# Altium PCB Copy of IBC_prijamnik_VB_ver1.PcbDoc
Units mil, origin at the board's own origin, x right, y up, seen from the top; angles counter-clockwise.
Board outline 2364.66 x 1970.95 mil, 4 copper layers (Top Layer, GND 1, GND 2, Bottom Layer), stack 61.418 mil thick; 74 components, 51 nets, 243 pads, 80 vias.
Unrouted connection lines stored in the file: 92.
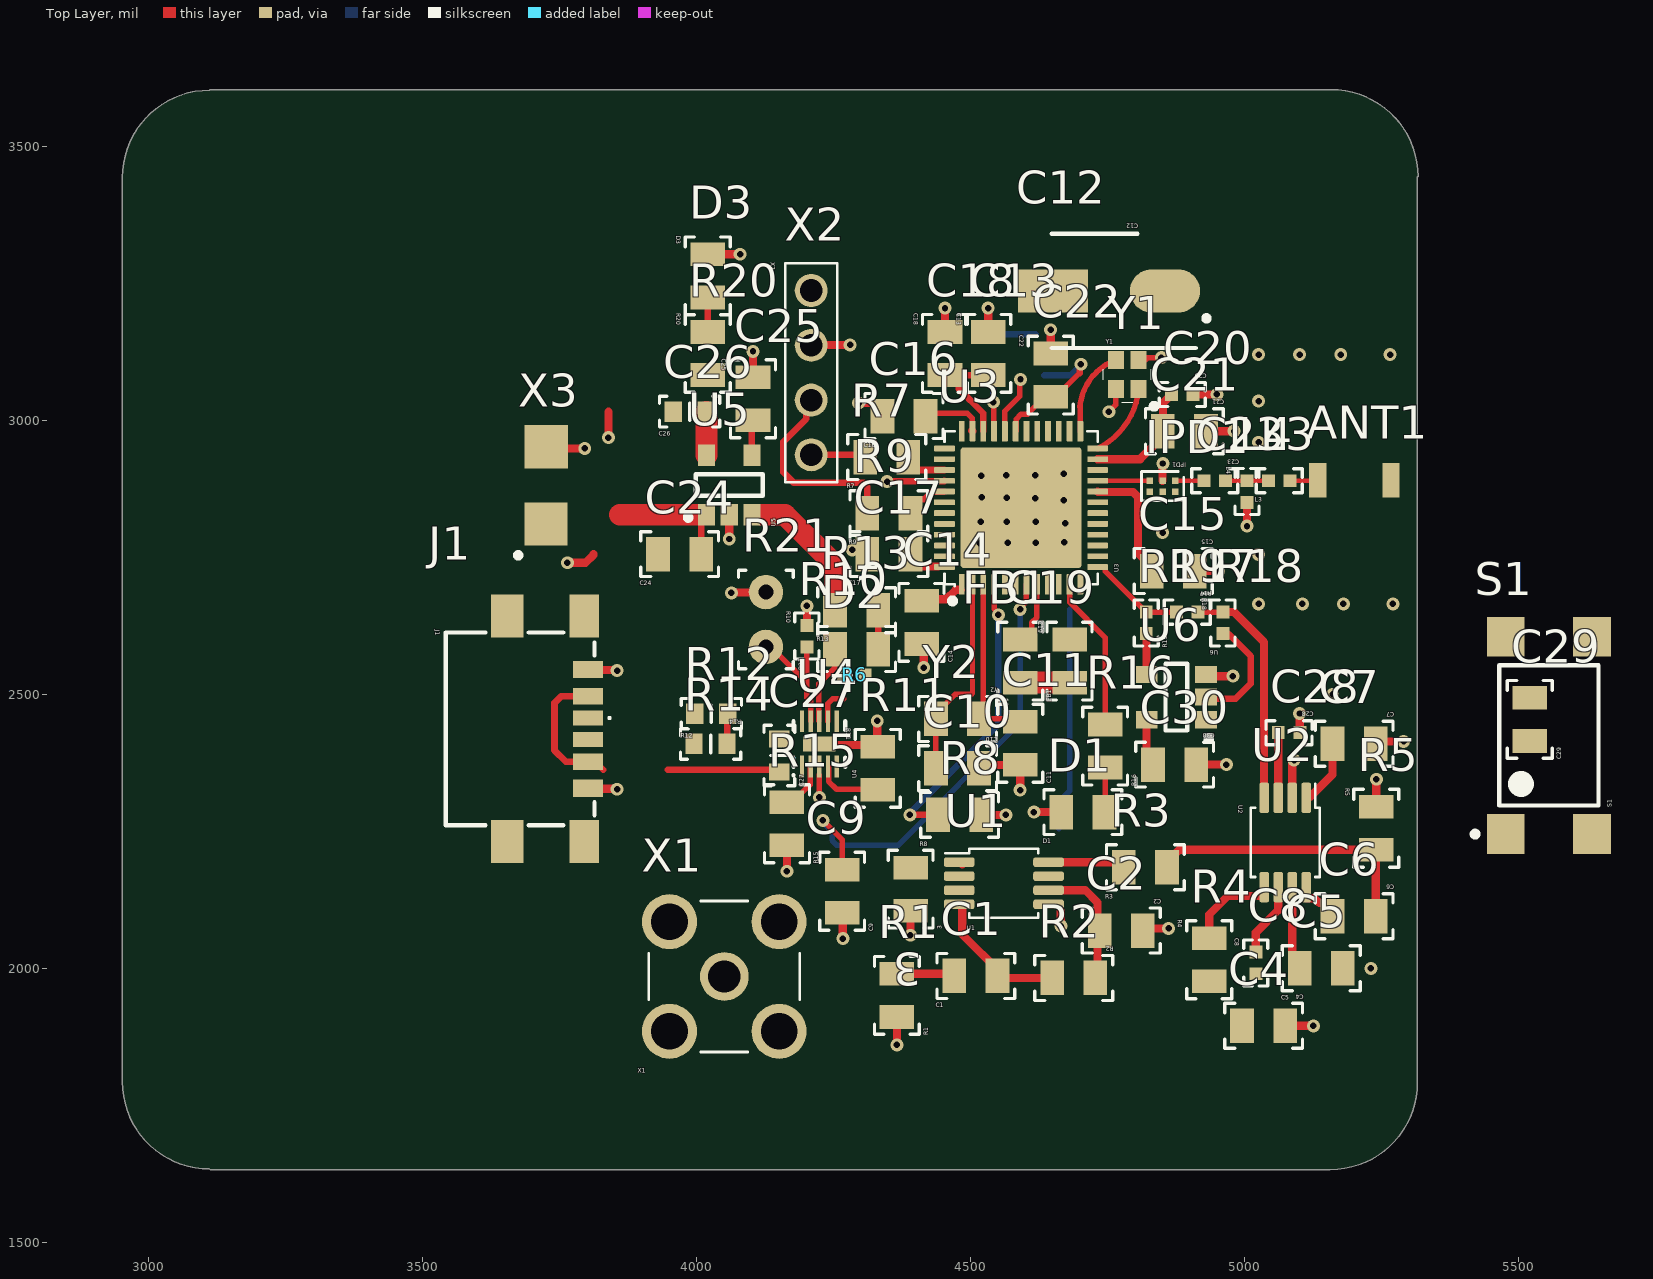
[diagram p0: Top Layer view]
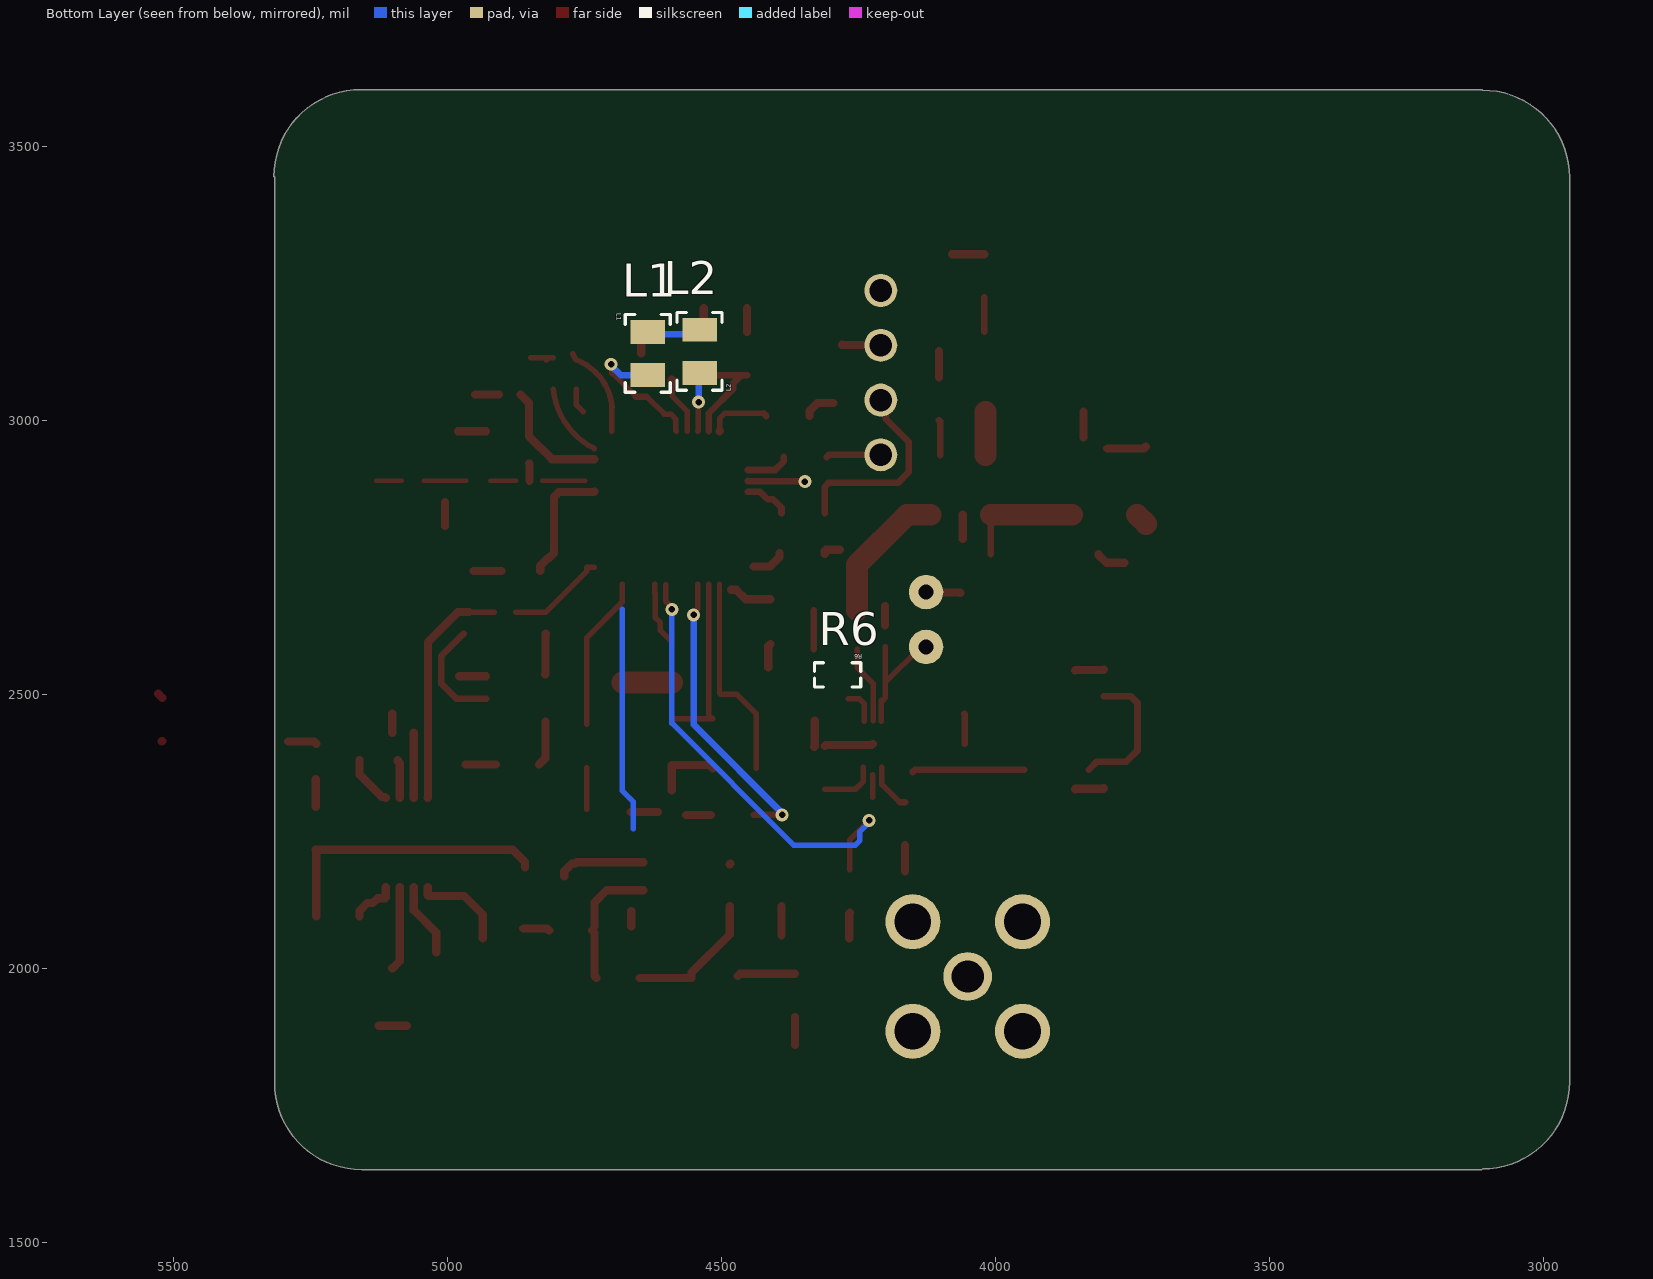
[diagram p1: Bottom Layer view, seen from below]
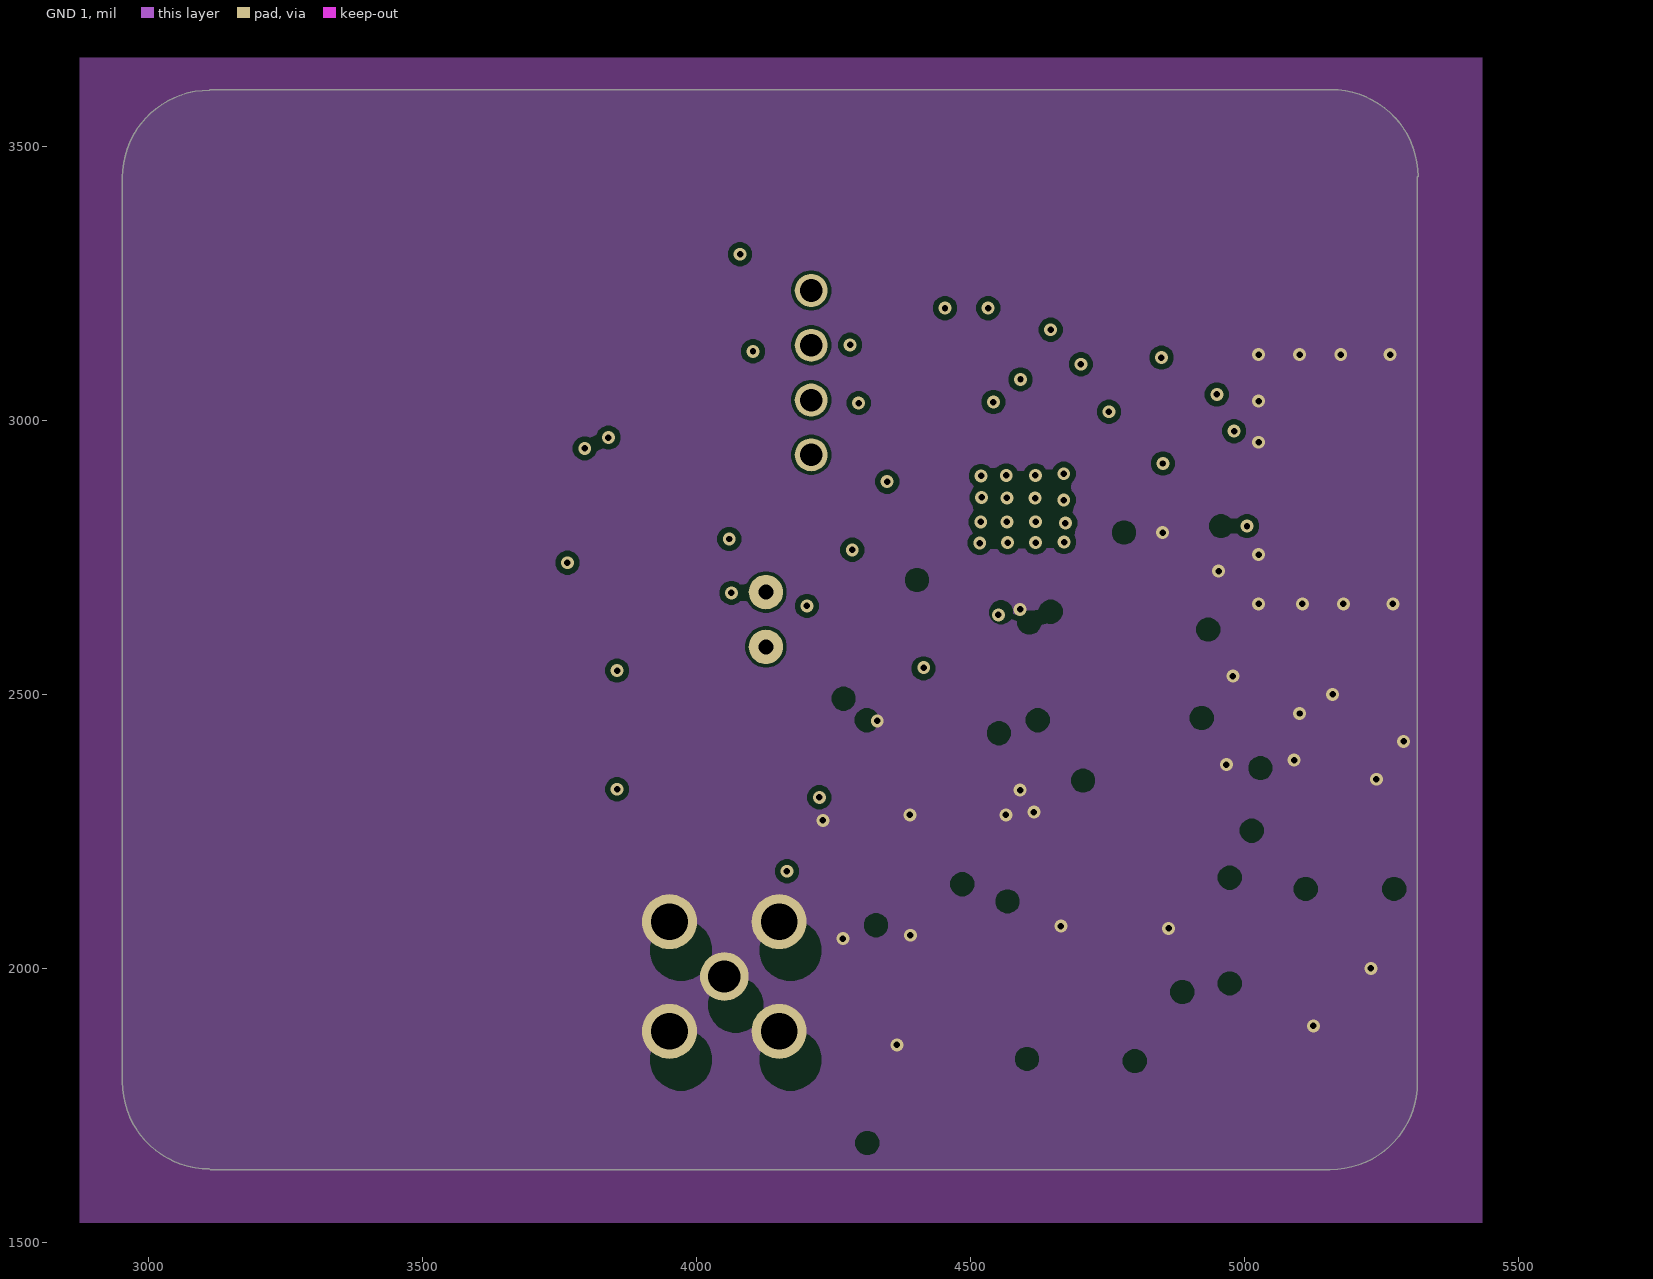
[diagram p2: GND 1]

## Layer stack, top to bottom
Top Solder: solder mask 0.787, SM-001, Dk 3.5
Top Layer: signal copper 1.378
Dielectric 2: prepreg 4.331, FR-4, Dk 4.29
GND 1: signal copper 1.378
Dielectric 1: dielectric 47.244, FR-4, Dk 4.29
GND 2: signal copper 1.378
Dielectric 3: prepreg 4.331, FR-4, Dk 4.29
Bottom Layer: signal copper 1.378
Bottom Solder: solder mask 0.787, SM-001, Dk 3.5

## Board outline
2951.53,1792.56 2951.53,3443.66 cw(c3110.24,3443.66) 3110.24,3602.36 3110.85,3602.97 5156.87,3602.97 5157.48,3603.59 cw(c5157.48,3444.88) 5316.19,3444.88 5314.96,3444.88 5314.96,1791.34 cw(c5156.25,1791.34) 5156.25,1632.63 3111.46,1632.63 3110.24,1633.86 cw(c3110.24,1792.56)

## Design rules (kind name [scope] priority, off if disabled: settings)
Clearance [All] p1: gap=5.98 ignorepadtopadclearanceinfootprint=TRUE except(15.75: Arc-Hole Track-Hole SMDPad-Hole THPad-Hole Via-Hole Fill-Hole Poly-Hole Region-Hole Text-Hole)
PlaneConnect [All] p1: pad.planeconnectstyle=Relief pad.reliefexpansion=20 pad.reliefentries=4 pad.reliefconductorwidth=10 pad.reliefairgap=10 via.planeconnectstyle=Direct via.reliefexpansion=20 via.reliefentries=4 via.reliefconductorwidth=10 via.reliefairgap=10
PolygonConnect [All] p1: connectstyle=Relief reliefconductorwidth=10 reliefentries=4 polygonreliefangle="90 Angle" airgapwidth=10
RoutingVias [All] p1: holewidth=11.81 width=23.62 viastyle="Through Hole" minholewidth=3.94 minwidth=7.87 maxholewidth=39.37 maxwidth=98.43
SolderMaskExpansion [All] p1: expansion=4 istentingtop=FALSE
SupplyNets "Schematic Supply Nets_1" [InNet('GND')] p1: voltage=0.000
SupplyNets "Schematic Supply Nets" [InNet('3V3')] p2: voltage=0.000
Width [All] p1: maxlimit=50 minlimit=10 preferedwidth=10
29 further rules are at their usual default settings.

## Classes and differential pairs
component class "STM32 MCU": C9 C10 C11 C12 C13 C14 C15 C16 C17 C18 C19 C20 C21 C22 C29 C30 D1 FB1 L1 L2 R7 R8 R9 R16 R17 R18 R19 S1 U3 U6 X2 Y1 Y2
component class "Logarithmic Amplifier": C4 C5 C6 C7 C8 C28 R4 R5 U2
component class "IPD and BT Antena": ANT1 C23 IPD1 L3 L4
component class Buffer: 3 C1 C2 R1 R2 R3 U1 X1
component class "Battery Charger and LDO Regulator": C24 C25 C26 C27 D2 D3 J1 J2 R6 R10 R11 R12 R13 R14 R15 R20 R21 U4 U5 X3

## Components (designator, comment, footprint, x,y, rotation, side; value= is the part's Value field where it differs from the comment)
3 "100n" 0805 4390,2144.37 r90 top value=100nF (schematic designator C3)
ANT1 "2450AT18B100E" ANT_2450AT18B100E 5199.8,2890.75 r0 top
C1 "100n" 0805 4509,1986 r0 top value=100nF
C2 "100n" 0805 4774.43,2068.93 r180 top value=100nF
C4 "100n" 0805 5034.37,1895 r180 top value=100nF
C5 "10n" 0805 5139.37,2000 r0 top value=10nF
C6 "100n" 0805 5199.37,2095 r180 top value=100nF
C7 "100n" 0805 5199.37,2410 r180 top value=100nF
C8 "22p" 0402 5020,2009.68 r270 top
C9 "100n" 0805 4265,2140.63 r90 top value=100nF
C10 "15p" 0805 4475.63,2365 r180 top value=15pF
C11 "15p" 0805 4590,2410.63 r90 top value=15pF
C12 "10u/16V" 1210 4751.97,3236.22 r180 top
C13 "100n" 0805 4531.5,3122.05 r270 top value=100nF
C14 "100n" 0805 4410,2631.4 r90 top value=100nF
C15 "100n" 0805 4869.37,2725 r180 top value=100nF
C16 "100n" 0805 4377.95,3007.87 r0 top value=100nF
C17 "100n" 0805 4350.39,2755.91 r0 top value=100nF
C18 "4u7" 0805 4452.76,3122.05 r270 top value=4u7F
C19 "100n" 0805 4680,2560.63 r270 top value=100nF
C20 "100p" 0402 4885.83,3047.24 r180 top
C21 "100n" 0805 4889.76,2980.32 r180 top value=100nF
C22 "4u7" 0805 4645.67,3082.68 r270 top value=4u7F
C23 "1p2" 0402 4944.88,2889.76 r180 top value=1.2pF
C24 "100n" 0805 3968.5,2755.91 r0 top value=100nF
C25 "10n" 0805 4102.36,3039.37 r270 top value=10nF
C26 "1u" 0603 3986.81,3015.75 r0 top value=1µF
C27 "1u" 0603 4150.59,2388.39 r90 top value=1µF
C28 "22p" 0402 5080.63,2430 r180 top
C29 "100n" 0805 5520,2454.37 r90 top value=100nF
C30 "100n" 0805 4871.77,2371.69 r180 top value=100nF
D1 "Green" 0805 4704.37,2285 r0 top
D2 "Green" 0805 4291.34,2582.68 r0 top
D3 "Green" 0805 4019.68,3263.78 r270 top
FB1 "MPZ2012S601AT000" 0805 4590,2560.63 r90 top
IPD1 "MLPF-WB55-01E3" IPD 4849.88,2879.92 r180 top
J1 "USB4135-GF-A" USB4135GFA 3677.17,2437.01 r270 top
L1 "10u" 0805 4633.86,3122.05 r270 bottom value=10uH
L2 "10n" 0805 4539.37,3125.98 r90 bottom value=10nH
L3 "3n3" 0402 5062.99,2889.76 r0 top value=3.3nH
L4 "2n7" 0402 5003.94,2870.08 r270 top value=2.7nH
R1 "49R9" 0805 4365,1950.63 r90 top value=49,9
R2 "2k" 0805 4687.82,1982.32 r180 top
R3 "49R9" 0805 4818.54,2184.28 r0 top value=49,9
R4 "4R7" 0805 4935,2015.63 r270 top value=4.7
R5 "52R3" 0805 5240,2255.63 r270 top value=52.3
R6 "0R0" 0402 4287.4,2535.43 r0 top
R7 "49R9" 0805 4346.46,2933.07 r0 top value=49,9
R8 "10k" 0805 4479.37,2280 r0 top
R9 "49R9" 0805 4350.39,2830.71 r0 top value=49,9
R10 "10k" 0402 4200.79,2606.3 r270 top
R11 "2k" 0805 4330,2365 r270 top
R12 "5k1" 0603 4026.18,2464.57 r0 top value=5.1kΩ
R13 "1k5" 0805 4291.34,2653.54 r0 top
R14 "5k1" 0603 4025,2409.45 r180 top value=5.1kΩ
R15 "2k2" 0805 4164.37,2263.78 r90 top value=2.2kΩ
R16 "1k5" 0805 4745,2405.63 r90 top
R17 "0R0" 0402 4894.69,2650 r180 top
R18 "0R0" 0402 4960,2630.32 r270 top
R19 "0R0" 0402 4820,2630.32 r90 top
R20 "1k5" 0805 4019.68,3122.05 r270 top
R21 "10k" "TH NTC" 4125.98,2686.61 r0 top
S1 "TL3301AF160QG" SOP400P1000X525-4N 5555,2425 r90 top
U1 "BUF602" MSOP 4560.18,2155.29 r270 top
U2 "AD8310ARMZ-REEL7" MSOP 5073.74,2229.65 r180 top
U3 "STM32WB55CGU6" STM32 4591.54,2840.55 r0 top
U4 "BQ24040DSQR" WSON-10 4223.43,2409.45 r90 top
U5 "TPS73633DBVR" "SOT23 5pin" 4059.06,2881.89 r90 top
U6 "74AHC1G17GWH" "SOT23 5pin" 4875,2495 r180 top
X1 "60312002114503" SMA 4050,1985 r0 top
X2 "HDR 1X4" "HEADER 1X4" 4208.66,3087.01 r270 top
X3 "BAT HDR" BATTERY 1466.73,7787.73 r90 top
Y1 "NX2016SA-32MHz" NX2016_4P 4785.43,3083.66 r90 top
Y2 "NX2012SA-32.768kHz" 0805 4475.63,2455 r180 top

## Footprints (in the part's own frame and the unit in brackets; to place one, negate y for a bottom-side part, rotate by r counter-clockwise, add the part's x,y. Pads: shape width x height; smd on the part's side, far side on the other; paste and mask are expansions set on the pad)
0402 [mm]
  rect 0.6x0.6 smd: 1(-0.5,0) 2(0.5,0)
  silkscreen extent -1.07,-0.56 1.07,0.56, body extent -0.5,-0.25 0.5,0.25, height 0.48
0603 [mm]
  rect 0.8x0.95 smd: 1(-0.765,0) 2(0.765,0)
  silkscreen extent -1.4,-0.71 1.4,0.71, body extent -0.8,-0.41 0.8,0.41, height 0.45
0805 [mm]
  rect 1.1x1.6 smd: 1(-1,0) 2(1,0)
  silkscreen extent -1.8,-1.04 1.8,1.04, body extent -1,-0.62 1,0.63, height 0.6
1210 [mm]
  oval 3.25x2 smd: 1(-2.6,0)
  rect 3.25x2 smd: 2(2.6,0)
  silkscreen extent -4.63,-2.65 2.65,2.65
ANT_2450AT18B100E [mm]
  rect 0.8x1.6 smd: 1(-1.7,0) 2(1.7,0)
  body extent -1.6,-0.8 1.6,0.8, height 1.41
BATTERY [mm]
  rect 2x2 smd: NEG(-122.83,-57.358) POS(-126.408,-57.345)
  silkscreen extent -127.98,-56.17 -127.75,-55.94
"HEADER 1X4" [mm]
  round 1.53 hole 1.05 paste-2539.97: 1(-3.81,0) 2(-1.27,0) 3(1.27,0) 4(3.81,0)
  silkscreen extent -5.08,-1.2 5.08,1.2, body extent -5.33,-1.45 5.33,1.45, height 8.39
IPD [mm]
  rect 0.3x0.3 smd paste-0.05: A1(-0.587,-0.25) A2(0,-0.25) A3(0.587,-0.25) B1(-0.587,0.25) B2(0,0.25) B3(0.587,0.25)
  silkscreen extent -0.98,-0.68 0.98,0.68, body extent -1.05,-0.75 1.05,0.75, height 0.41
MSOP [mm]
  rrect50% 0.45x1.42 smd mask+0.06: 1(-0.975,-2.07) 2(-0.325,-2.07) 3(0.325,-2.07) 4(0.975,-2.07) 5(0.975,2.07) 6(0.325,2.07) 7(-0.325,2.07) 8(-0.975,2.07)
  silkscreen extent -1.6,-2.72 1.6,1.6, body extent -1.8,-2.98 1.8,2.98, height 1.1
NX2016_4P [mm]
  rect 0.85x0.75 smd mask+0.05: 1(-0.675,-0.525) 2(0.675,-0.525) 3(0.675,0.525) 4(-0.675,0.525)
  silkscreen extent -1.6,-1.37 1.3,1.12, body extent -1,-0.8 1,0.8, height 0.7
SMA [mm]
  round 2.25 hole 1.5 paste-2539.97: 1(0,0)
  round 2.55 hole 1.7 paste-2539.97: 2(-2.54,2.54) 3(2.54,2.54) 4(-2.54,-2.54) 5(2.54,-2.54)
  silkscreen extent -3.5,-3.5 3.5,3.5, body extent -4.06,-4.06 4.06,4.06, height 9.56
SOP400P1000X525-4N [mm]
  rect 1.85x1.75 smd: 1(-4.575,2) 2(-4.575,-2) 3(4.575,-2) 4(4.575,2)
  silkscreen extent -4.7,-2.3 3.25,3.55, body extent -3.65,-2.3 3.65,2.3, height 5.25
"SOT23 5pin" [mm]
  rect 1x0.8 smd: 1(-1.375,1.05) 2(-1.375,0) 3(-1.375,-1.05) 4(1.375,-1.05) 5(1.375,1.05)
  silkscreen extent -1.62,-1.55 0.5,2.03, body extent -0.88,-1.52 0.87,1.53, height 1.45
STM32 [mm]
  rrect25% 0.27x0.96 smd mask+0.07: 1(-2.75,-3.55) 2(-2.25,-3.55) 3(-1.75,-3.55) 4(-1.25,-3.55) 5(-0.75,-3.55) 6(-0.25,-3.55) 7(0.25,-3.55) 8(0.75,-3.55) 9(1.25,-3.55) 10(1.75,-3.55) 11(2.25,-3.55) 12(2.75,-3.55) 25(2.75,3.55) 26(2.25,3.55) 27(1.75,3.55) 28(1.25,3.55) 29(0.75,3.55) 30(0.25,3.55) 31(-0.25,3.55) 32(-0.75,3.55) 33(-1.25,3.55) 34(-1.75,3.55) 35(-2.25,3.55) 36(-2.75,3.55)
  rrect25% 0.96x0.27 smd mask+0.07: 13(3.55,-2.75) 14(3.55,-2.25) 15(3.55,-1.75) 16(3.55,-1.25) 17(3.55,-0.75) 18(3.55,-0.25) 19(3.55,0.25) 20(3.55,0.75) 21(3.55,1.25) 22(3.55,1.75) 23(3.55,2.25) 24(3.55,2.75) 37(-3.55,2.75) 38(-3.55,2.25) 39(-3.55,1.75) 40(-3.55,1.25) 41(-3.55,0.75) 42(-3.55,0.25) 43(-3.55,-0.25) 44(-3.55,-0.75) 45(-3.55,-1.25) 46(-3.55,-1.75) 47(-3.55,-2.25) 48(-3.55,-2.75)
  rrect5% 5.6x5.6 smd paste+0 mask+0.07: 49(0,0)
  silkscreen extent -3.55,-4.44 3.55,3.55, body extent -3.96,-3.96 3.96,3.96, height 0.6
"TH NTC" [mm] "TH-2, 3,7x2,54 mm"
  round 1.6 hole 0.7: 1(0,0) 4(0,-2.54)
  silkscreen extent -1.27,-3.56 1.27,1.02
USB4135GFA [mm]
  rect 0.7x1.4 smd: A5(-0.5,3.155) B5(0.5,3.155)
  rect 0.76x1.4 smd: A9(1.52,3.155) B9(-1.52,3.155)
  rect 0.8x1.4 smd: A12(2.75,3.155) B12(-2.75,3.155)
  rect 2x1.35 smd: MP1(-5.225,2.98) MP2(5.225,2.98)
  rect 2x1.5 smd: MP3(-5.225,-0.6) MP4(5.225,-0.6)
  silkscreen extent -4.47,-3.45 4.47,4.2
WSON-10 [mm]
  rect 1x0.2 smd: 1(-1.045,0.8) 2(-1.045,0.4) 3(-1.045,0) 4(-1.045,-0.4) 5(-1.045,-0.8) 6(1.045,-0.8) 7(1.045,-0.4) 8(1.045,0) 9(1.045,0.4) 10(1.045,0.8)
  rect 0.69x1.5 smd: 11(0,0)
  silkscreen extent -1.5,-1.2 1.05,1.25, body extent -1.05,-1.05 1.05,1.05, height 0.8

## Part data
3 C1 C2 C4 C6 C7 C9 C13 C14 C15 C16 C17 C19 C21 C24 C29 C30: library part MCJCU21GBB7104KTPA01, "Kondenzator, X7R, 10%, 50VDC", Capacitance=100nF, Case/Package=0805, Manufacturer=TDK, Manufacturer Part Number=C2012X7R1H104K125AE, Supplier Part Number 1=963-MCJCU21GBB7104KT, Category="Ceramic Capacitors", ComponentLink1Description=https://datasheet.ciiva.com/29534/mlcc-commercial-soft-en-29534235.pdf?src-supplier=Digi-Key, Kučište=0805, Supplier 1=Mouser, Supplier 2=Mouser, Supplier Part Number 2=810-C2012X7R1H104KAE
ANT1: "Antena, 2.45GHz", Case/Package=CSMD, Manufacturer=Johanson, Supplier Part Number 1=609-2450AT18B100E, Category="RF Antennas", ComponentLink1Description=https://datasheet.ciiva.com/24025/antenna-2450at18b100-242422-24025839.pdf?src-supplier=Mouser, Manufacturer Part Number=2450AT18B100E, Supplier 1=Mouser
C5 C25: library part C0805C103K5RECAUTO, "Kondenzator, C0G, 10%, 50VDC", Capacitance=10nF, Case/Package=0805, Manufacturer=KEMET, Supplier Part Number 1=80-C0805C103K5RECAUT, Category="Ceramic Capacitors", ComponentLink1Description=http://www.farnell.com/datasheets/2723804.pdf?src-supplier=Farnell, Kučište=0805, Manufacturer Part Number=C0805C103K5RECAUTO, Supplier 1=Mouser
C8 C28: library part KAM05ACG1H220FH, "Kondenzator, C0G, 1%, 50VDC", Supplier Part Number 1=581-KAM05ACG1H220FH, Kučište=0402, Supplier 1=Mouser
C10 C11: library part 08052U150JAT2A, "Kondenzator, C0G, 10%, 160VDC", Capacitance=15pF, Case/Package=0805, Manufacturer=Murata, Manufacturer Part Number=GRM21A5C2D150JW01D, Supplier Part Number 1=81-GRM21A5C2D150JW1D, Category="Ceramic Capacitors", ComponentLink1Description=http://components.arrow.com/part/dataview/0323_07284744?src-supplier=Arrow+Europe, Kučište=0805, Supplier 1=Mouser, Supplier 2=Mouser, Supplier Part Number 2=581-08052U150J
C12: library part 581-THJB106K016SJN, "Elektrolitski kondenzator, Ta, 10%, 16V", Supplier Part Number 1=478-13152-1-ND, Supplier 1=DigiKey
C18 C22: library part CGA4J1X7R1H475K125AC, "Kondenzator, C0G, 10%, 50VDC", Capacitance=4u7F, Case/Package=0805, Manufacturer=TDK, Supplier Part Number 1=810-CGA4J1X7R1H475K1, Category="Ceramic Capacitors", ComponentLink1Description=https://product.tdk.com/info/en/catalog/datasheets/mlcc_automotive_general_en.pdf?src-supplier=Digi-Key, Kučište=0805, Manufacturer Part Number=CGA4J1X7R1H475K125AC, Supplier 1=Mouser
C20: library part GCM1555C2A101GE02D, "Kondenzator, C0G, 2%, 100VDC", Supplier Part Number 1=490-GCM1555C2A101GE02DTR-ND, Kučište=0402, Supplier 1=DigiKey
C23: library part 609-QSCF500Q1R2B1GV0, "Kondenzator, C0G, 10%, 50VDC", Capacitance=1.2pF, Case=0402, Manufacturer=Johanson, Manufacturer Part Number=500R07S1R2BV4T, Supplier Part Number 1=609-500R07S1R2BV4T, Case/Package=0402, Category="Ceramic Capacitors", ComponentLink1Description=https://datasheet.ciiva.com/1461/1731432-1461669.pdf?src-supplier=Element14, Supplier 1=Mouser, Supplier 2="Arrow Electronics", Supplier Part Number 2=500R07S1R2BV4T
C26 C27: library part C1608X7R1H105K080AB, "Kondenzator, X7R, 10%, 50VDC", Dielectric Material=Ceramic, Manufacturer=TDK, Max Operating Temperature=125°C, Min Operating Temperature=-55°C, Supplier Part Number=445-C1608X7R1H105K080ABCT-ND, Voltage Rating (DC)=50V, Category="Ceramic Capacitors", ComponentLink1Description=https://datasheet.octopart.com:443/C1608X7R1H105K080AB-TDK-datasheet-175423548.pdf?src-supplier=IHS, ComponentLink1URL=https://datasheet.octopart.com:443/C1608X7R1H105K080AB-TDK-datasheet-175423548.pdf?src-supplier=IHS, Height=800µm, Kučište=0603, Length=1.6mm, Lifecycle Status=Production, Manufacturer Part Number=C1608X7R1H105K080AB, Mounting Technology="Surface Mount", Number of Terminals=2, Pricing="1=0.21, 10=0.121, 50=0.0866, 100=0.076, 500=0.05824, 1000=0.05277 (USD)", Stock=9450, Supplier=DigiKey, Width=800µm
D1 D2 D3: library part SM0805GCL, "Dioda, svjetleća, 1,9V", Case/Package=0805, Manufacturer=Bivar, Supplier Part Number 1=749-SM0805GCL, Category=LEDs, ComponentLink1Description=https://datasheet.ciiva.com/16487/sm0805gcl-16487554.pdf?src-supplier=Future+Electronics, Kučište=0805, Manufacturer Part Number=SM0805GCL, Supplier 1=Mouser
FB1: "Feritna perla, 600Ohm", Case/Package=0805, Manufacturer=TDK, Supplier Part Number 1=810-MPZ2012S601AT000, Category=Inductors, ComponentLink1Description=https://datasheet.ciiva.com/46634/beads-commercial-power-mpz-en-46634335.pdf?src-supplier=Digi-Key, Kučište=0805, Manufacturer Part Number=MPZ2012S601AT000, Supplier 1=Mouser
IPD1: "RF Filtar, 2.4-2.5GHz", Manufacturer=STMicroelectronics, Supplier Part Number 1=511-MLPF-WB55-01E3, Category="Integrated Passive Device", ComponentLink1Description=http://www.farnell.com/datasheets/2802556.pdf?src-supplier=Farnell, Manufacturer Part Number=MLPF-WB55-01E3, Supplier 1=Mouser
J1: "USB-C priključak", Manufacturer_Name="GCT (GLOBAL CONNECTOR TECHNOLOGY)", Mouser Part Number=640-USB4135-GF-A, Supplier Part Number 1=3946920, Datasheet Link=https://ar.mouser.com/datasheet/2/837/usb4135-2930399.pdf, Geometry.Height=3.5mm, Manufacturer_Part_Number=USB4135-GF-A, Mouser Price/Stock=https://www.mouser.co.uk/ProductDetail/GCT/USB4135-GF-A?qs=Li%252BoUPsLEnt6HRo6RUvaXA%3D%3D, Supplier 1=Farnell
L1: library part LSQBA201212T100KR, "Zavojnica, neoklopljena, 500mADC,", Case/Package=0805, Manufacturer=Murata, Manufacturer Part Number=LQM21FN100M70L, Category="Fixed Inductors", ComponentLink1Description=https://datasheet.ciiva.com/18088/getdatasheetpartid-74214-18088963.pdf?src-supplier=Verical, Kučište=0805, Supplier 1=Avnet, Supplier 2=Mouser, Supplier Part Number 1=LQM21FN100M70L, Supplier Part Number 2=81-LQM21FN100M70L
L2: library part AIMC-0805-10NJ-T, "Zavojnica, neoklopljena, +/-5%, 300mADC", Case Code (Imperial)=0402, Case Code (Metric)=1005, Case/Package=0805, Manufacturer=Abracon, Max Operating Temperature=155°C, Min Operating Temperature=-55°C, Power Dissipation=62.5mW, Supplier Part Number=2692041, Supplier Part Number 1=815-AIMC-0805-10NJT, Temperature Coefficient=400ppm/°C, Voltage Rating=50V, Category="Fixed Inductors", ComponentLink1Description=https://datasheet.octopart.com:443/MCMR04X000-PTL-Multicomp-datasheet-10850617.pdf?src-supplier=IHS, ComponentLink1URL=https://datasheet.octopart.com:443/MCMR04X000-PTL-Multicomp-datasheet-10850617.pdf?src-supplier=IHS, ComponentLink2Description=https://datasheet.octopart.com:443/MCMR04X000-PTL-Multicomp-datasheet-99731353.pdf?src-supplier=Farnell, ComponentLink2URL=https://datasheet.octopart.com:443/MCMR04X000-PTL-Multicomp-datasheet-99731353.pdf?src-supplier=Farnell, ComponentLink3Description=https://datasheet.octopart.com:443/MCMR04X000-PTL-Multicomp-datasheet-15896274.pdf?src-supplier=Newark, ComponentLink3URL=https://datasheet.octopart.com:443/MCMR04X000-PTL-Multicomp-datasheet-15896274.pdf?src-supplier=Newark, Composition=Ceramic, Contact Plating=Tin, Kučište=0805, Lifecycle Status=Production, Manufacturer Part Number=AIMC-0805-10NJ-T, Mounting Technology="Surface Mount", Number of Terminals=2, Packaging="Cut Tape", Power Rating=62.5mW, Pricing="10000=0.0033, 50000=0.0029 (GBP)", REACH SVHC=No, RoHS=Compliant, Stock=490000, Supplier=Farnell, Supplier 1=Mouser, Voltage Rating (DC)=50V
L3: library part BSCH1005053N3SCS, "Zavojnica, neoklopljena, 400mADC", Case/Package=0402, Manufacturer=Johanson, Manufacturer Part Number=L-07C3N3SV6T, Supplier Part Number 1=609-L-07C3N3SV6T, Category="Fixed Inductors", Kučište=0402, Supplier 1=Mouser, Supplier 2=Farnell, Supplier Part Number 2=3773633
L4: library part LRC0402CS2N7GV001T, "RF zavojnica, neoklopljena, 300mADC", Case/Package=0402, Manufacturer=Johanson, Manufacturer Part Number=L-07C2N7SV6T, Supplier Part Number 1=609-L-07C2N7SV6T, Category="Fixed Inductors", ComponentLink1Description=https://datasheet.ciiva.com/1473/1168792-1473898.pdf?src-supplier=Element14, Kučište=0402, Supplier 1=Mouser, Supplier 2=DigiKey, Supplier Part Number 2=712-LRC0402CS2N7GV001TCT-ND
R1 R3 R7 R9: library part AC0805FR-0749R9L, "Otpornik, ±100ppm/C, 125mW", Case/Package=0805, Manufacturer=Yageo, Supplier Part Number 1=603-AC0805FR-0749R9L, Category="Chip SMD Resistors", ComponentLink1Description=http://www.yageo.com/NewPortal/yageodocoutput?fileName=/pdf/R-Chip/PYu-AC_51_RoHS_L_6.pdf&src-supplier=Digi-Key, Kučište=0805, Manufacturer Part Number=AC0805FR-0749R9L, Supplier 1=Mouser
R2 R11: library part RC0805FR-102KL, "Otpornik, 1%, 125mW", Manufacturer=Yageo, Supplier Part Number 1=603-RC0805FR-102KL, Category=Resistors, Kučište=0805, Manufacturer Part Number=RC0805FR-102KL, Supplier 1=Mouser
R4: library part AC0805FR-074R7L, "Otpornik, 1%, 125mW", Case/Package=0805, Manufacturer=Yageo, Supplier Part Number 1=603-AC0805FR-074R7L, Category="Chip SMD Resistors", ComponentLink1Description=https://datasheet.ciiva.com/12577/pyu-ac-51-rohs-l-2-12577194.pdf?src-supplier=Mouser, Kučište=0805, Manufacturer Part Number=AC0805FR-074R7L, Supplier 1=Mouser
R5: library part RC0805FR-0752R3L, "Otpornik, 1%, 125mW", Case=0805, Manufacturer=Yageo, Supplier Part Number 1=603-RC0805FR-0752R3L, Case/Package=0805, Category="Chip SMD Resistors", Manufacturer Part Number=RC0805FR-0752R3L, Supplier 1=Mouser
R6 R17 R18 R19: library part CRCW06030000Z0EA, "Otpornik, 1%, 100mW", Supplier Part Number 1="MCMR04X000 PTL", Kučište=0402, Supplier 1=Farnell
R8: library part RC0805JR-0710KL, "Otpornik, 5%, 125mW", Case/Package=0805, Manufacturer=Yageo, Supplier Part Number 1=603-RC0805JR-0710KL, Category="Chip SMD Resistors", ComponentLink1Description=https://datasheet.ciiva.com/7983/444164-7983765.pdf?src-supplier=Element14, Kučište=0805, Manufacturer Part Number=RC0805JR-0710KL, Supplier 1=Mouser
R10: library part NTCG103JF103FT1, "NTC Termistor, 1%", Supplier Part Number 1=NTCG103JF103FT1S, Kučište=0402, Supplier 1=Farnell
R12 R14: library part MCT06030C5101FPW00, "Otpornik, ±100ppm/C, 100mW", Case Code (Imperial)=0603, Case Code (Metric)=1608, Manufacturer="Yageo Group", Manufacturer Part Number=AC0603FR-075K1L, Max Operating Temperature=155°C, Max Power Dissipation=100mW, Min Operating Temperature=-55°C, Supplier Part Number=1978087, Temperature Coefficient=100ppm/°C, Tolerance=1%, Voltage Rating=75V, Case/Package=0603, Category="Chip SMD Resistors", China RoHS=Non-Compliant, ComponentLink1Description=https://datasheet.octopart.com:443/AC0603FR-075K1L-Yageo-datasheet-182189377.pdf?src-supplier=IHS, ComponentLink1URL=https://datasheet.octopart.com:443/AC0603FR-075K1L-Yageo-datasheet-182189377.pdf?src-supplier=IHS, ComponentLink2Description=https://datasheet.octopart.com:443/AC0603FR-075K1L-Yageo-datasheet-86786639.pdf?src-supplier=Upverter, ComponentLink2URL=https://datasheet.octopart.com:443/AC0603FR-075K1L-Yageo-datasheet-86786639.pdf?src-supplier=Upverter, ComponentLink3Description=https://datasheet.octopart.com:443/AC0603FR-075K1L-Yageo-datasheet-178509465.pdf?src-supplier=Newark, ComponentLink3URL=https://datasheet.octopart.com:443/AC0603FR-075K1L-Yageo-datasheet-178509465.pdf?src-supplier=Newark, ComponentLink4Description=https://datasheet.octopart.com:443/AC0603FR-075K1L-Yageo-datasheet-151884373.pdf?src-supplier=Future+Electronics, ComponentLink4URL=https://datasheet.octopart.com:443/AC0603FR-075K1L-Yageo-datasheet-151884373.pdf?src-supplier=Future+Electronics, ComponentLink5Description=https://datasheet.octopart.com:443/AC0603FR-075K1L-Yageo-datasheet-166720450.pdf?src-supplier=Future+Electronics, ComponentLink5URL=https://datasheet.octopart.com:443/AC0603FR-075K1L-Yageo-datasheet-166720450.pdf?src-supplier=Future+Electronics, ComponentLink6Description=https://datasheet.octopart.com:443/AC0603FR-075K1L-Yageo-datasheet-137699919.pdf?src-supplier=Future+Electronics, ComponentLink6URL=https://datasheet.octopart.com:443/AC0603FR-075K1L-Yageo-datasheet-137699919.pdf?src-supplier=Future+Electronics, ComponentLink7Description=https://datasheet.octopart.com:443/AC0603FR-075K1L-Yageo-datasheet-128679721.pdf?src-supplier=X-ON, ComponentLink7URL=https://datasheet.octopart.com:443/AC0603FR-075K1L-Yageo-datasheet-128679721.pdf?src-supplier=X-ON, ComponentLink8Description=https://datasheet.octopart.com/AC0603FR-075K1L-Yageo-datasheet-12512238.pdf, ComponentLink8URL=https://datasheet.octopart.com/AC0603FR-075K1L-Yageo-datasheet-12512238.pdf, ComponentLink9Description=https://datasheet.octopart.com:443/AC0603FR-075K1L-Yageo-Group-datasheet-190301926.pdf?src-supplier=element14+APAC, ComponentLink9URL=https://datasheet.octopart.com:443/AC0603FR-075K1L-Yageo-Group-datasheet-190301926.pdf?src-supplier=element14+APAC, ComponentLink10Description=http://sigma.octopart.com:80/conflict_mineral_statement/Yageo-company-3.pdf?src-supplier=Compliance+Statements, ComponentLink10URL=http://sigma.octopart.com:80/conflict_mineral_statement/Yageo-company-3.pdf?src-supplier=Compliance+Statements, ComponentLink11Description=http://sigma.octopart.com:80/rohs_statement/Yageo-company-2.pdf?src-supplier=Compliance+Statements, ComponentLink11URL=http://sigma.octopart.com:80/rohs_statement/Yageo-company-2.pdf?src-supplier=Compliance+Statements, Composition="Thick Film", Features="Automotive AEC-Q200, Moisture Resistant", Height=450µm, Kučište=0603, Length=1.6mm, Lifecycle Status=Production, Mounting Technology="Surface Mount", Number of Terminals=2, Number of Terminations=2, Packaging="Tape & Reel", Power Dissipation=100mW, Power Rating=100mW, Pricing="500=0.005, 2500=0.005, 5000=0.004, 7500=0.004, 10000=0.004 (GBP)", REACH SVHC=Yes, RoHS=Compliant, Schedule B="8533210045, 8533210045|8533210045|8533210045|8533210045|8533210045|8533210045|8533210045|8533210045|8533210045|8533210045|8533210045|8533210045|8533210045|8533210045|8533210045|8533210045|8533210045|8533210045|8533210045|8533210045|8533210045|8533210045|8533210045|85", Stock=3500, Supplier=RS, Supplier 1=RS, Supplier Part Number 1=1978087, Termination=SMD/SMT, Weight=2.012816mg, Width=800µm, Working Voltage=75V
R13 R16 R20: library part MCU08050C1501FP5, "Otpornik, ±50ppm/C, 100mW", Supplier Part Number 1=MCU08050C1501FP500, ComponentLink5Description=https://datasheet.octopart.com:443/CRCW12061K50JNEA-Vishay-datasheet-21226360.pdf?src-supplier=Newark, ComponentLink5URL=https://datasheet.octopart.com:443/CRCW12061K50JNEA-Vishay-datasheet-21226360.pdf?src-supplier=Newark, ComponentLink8Description=https://datasheet.octopart.com:443/CRCW12061K50JNEA-Vishay-datasheet-24897302.pdf?src-supplier=Farnell, ComponentLink8URL=https://datasheet.octopart.com:443/CRCW12061K50JNEA-Vishay-datasheet-24897302.pdf?src-supplier=Farnell, ComponentLink9Description=https://datasheet.octopart.com:443/CRCW12061K50JNEA-Vishay-datasheet-62316122.pdf?src-supplier=Future+Electronics, ComponentLink9URL=https://datasheet.octopart.com:443/CRCW12061K50JNEA-Vishay-datasheet-62316122.pdf?src-supplier=Future+Electronics, ComponentLink10Description=https://datasheet.octopart.com:443/CRCW12061K50JNEA-Vishay-datasheet-5300368.pdf?src-supplier=Future+Electronics, ComponentLink10URL=https://datasheet.octopart.com:443/CRCW12061K50JNEA-Vishay-datasheet-5300368.pdf?src-supplier=Future+Electronics, ComponentLink11Description=https://datasheet.octopart.com:443/CRCW12061K50JNEA-Vishay-datasheet-137115460.pdf?src-supplier=X-ON, ComponentLink11URL=https://datasheet.octopart.com:443/CRCW12061K50JNEA-Vishay-datasheet-137115460.pdf?src-supplier=X-ON, ComponentLink12Description=https://datasheet.octopart.com:443/CRCW12061K50JNEA-Vishay-Dale-datasheet-47688880.pdf?src-supplier=RS+(Formerly+Allied+Electronics), ComponentLink12URL=https://datasheet.octopart.com:443/CRCW12061K50JNEA-Vishay-Dale-datasheet-47688880.pdf?src-supplier=RS+(Formerly+Allied+Electronics), ComponentLink13Description=https://datasheet.octopart.com:443/CRCW12061K50JNEA-Vishay-datasheet-12001583.pdf?src-supplier=RS+(Formerly+Allied+Electronics), ComponentLink13URL=https://datasheet.octopart.com:443/CRCW12061K50JNEA-Vishay-datasheet-12001583.pdf?src-supplier=RS+(Formerly+Allied+Electronics), ComponentLink14Description=https://datasheet.octopart.com:443/CRCW12061K50JNEA-Vishay-datasheet-5306405.pdf?src-supplier=RS+(Formerly+Allied+Electronics), ComponentLink14URL=https://datasheet.octopart.com:443/CRCW12061K50JNEA-Vishay-datasheet-5306405.pdf?src-supplier=RS+(Formerly+Allied+Electronics), ComponentLink15Description=https://datasheet.octopart.com:443/CRCW12061K50JNEA-Vishay-datasheet-11540273.pdf?src-supplier=Arrow+Electronics, ComponentLink15URL=https://datasheet.octopart.com:443/CRCW12061K50JNEA-Vishay-datasheet-11540273.pdf?src-supplier=Arrow+Electronics, ComponentLink16Description=https://datasheet.octopart.com:443/CRCW12061K50JNEA-Vishay-datasheet-8445837.pdf?src-supplier=element14, ComponentLink16URL=https://datasheet.octopart.com:443/CRCW12061K50JNEA-Vishay-datasheet-8445837.pdf?src-supplier=element14, ComponentLink17Description=https://datasheet.octopart.com:443/CRCW12061K50JNEA-Vishay-datasheet-5377184.pdf?src-supplier=Garrett, ComponentLink17URL=https://datasheet.octopart.com:443/CRCW12061K50JNEA-Vishay-datasheet-5377184.pdf?src-supplier=Garrett, ComponentLink18Description=https://datasheet.octopart.com:443/CRCW12061K50JNEA-Vishay-datasheet-148188.pdf?src-supplier=Garrett, ComponentLink18URL=https://datasheet.octopart.com:443/CRCW12061K50JNEA-Vishay-datasheet-148188.pdf?src-supplier=Garrett, ComponentLink19Description=https://datasheet.octopart.com:443/CRCW12061K50JNEA-Vishay-datasheet-41916.pdf?src-supplier=Garrett, ComponentLink19URL=https://datasheet.octopart.com:443/CRCW12061K50JNEA-Vishay-datasheet-41916.pdf?src-supplier=Garrett, ComponentLink20Description=http://sigma.octopart.com:80/rohs_statement/Vishay-company-15.pdf?src-supplier=Compliance+Statements, ComponentLink20URL=http://sigma.octopart.com:80/rohs_statement/Vishay-company-15.pdf?src-supplier=Compliance+Statements, Kučište=0805, Supplier 1=Farnell
R15: library part MCU08050C2201FP5, "Otpornik, ±100ppm/C, 125mW", Case Code (Imperial)=0805, Case Code (Metric)=2012, Manufacturer=Panasonic, Manufacturer Lifecycle Status=ACTIVE, Manufacturer Part Number=ERJ-PB6B2201V, Max Operating Temperature=155°C, Max Power Dissipation=250mW, Min Operating Temperature=-55°C, Supplier Part Number=4541375, Temperature Coefficient=50ppm/°C, Tolerance=0.1%, Voltage Rating (DC)=150V, Case/Package=0805, Category="Chip SMD Resistors", ComponentLink1Description=https://datasheet.octopart.com:443/ERJ-PB6B2201V-Panasonic-datasheet-82522998.pdf?src-supplier=Panasonic, ComponentLink1URL=https://datasheet.octopart.com:443/ERJ-PB6B2201V-Panasonic-datasheet-82522998.pdf?src-supplier=Panasonic, ComponentLink2Description=https://datasheet.octopart.com:443/ERJPB6B2201V-Panasonic-datasheet-176289525.pdf?src-supplier=TME, ComponentLink2URL=https://datasheet.octopart.com:443/ERJPB6B2201V-Panasonic-datasheet-176289525.pdf?src-supplier=TME, ComponentLink3Description=https://sigma.octopart.com:443/150570796/technical_drawing/Panasonic-ERJPB6B2201V.pdf?src-supplier=Panasonic+SCT, ComponentLink3URL=https://sigma.octopart.com:443/150570796/technical_drawing/Panasonic-ERJPB6B2201V.pdf?src-supplier=Panasonic+SCT, ComponentLink4Description=https://datasheet.octopart.com:443/ERJPB6B2201V-Panasonic-datasheet-177212511.pdf?src-supplier=Burklin+Elektronik, ComponentLink4URL=https://datasheet.octopart.com:443/ERJPB6B2201V-Panasonic-datasheet-177212511.pdf?src-supplier=Burklin+Elektronik, Composition="Thick Film", Country of Origin=Japan, Export Control Classification Number (ECCN) Code=EAR99, Features="Automotive AEC-Q200", Harmonized Tariff Schedule (HTS) Code=8533.21.00.30, Height=600µm, Height - Seated (Max)=711.2µm, Introduction Date=2016-02-25, Kučište=0805, Length=2mm, Lifecycle Status=Production, Mounting Technology="Surface Mount", Number of Terminals=2, Number of Terminations=2, Part Series="High Precision Thick Film Chip Resistors", Power Dissipation=250mW, Power Rating=250mW, Pricing="10=0.0861, 100=0.0757, 500=0.0585, 1000=0.0534, 2500=0.0478, 5000=0.0422 (GBP)", REACH SVHC=Yes, RoHS=Compliant, Schedule B="8533210045, 8533210045|8533210045|8533210045|8533210045|8533210045", Stock=4030, Supplier=Farnell, Supplier 1=Farnell, Supplier 2=Farnell, Supplier Part Number 1=4541375, Supplier Part Number 2=MCU08050C2201FP500, Width=1.25mm, Working Voltage=150V
R21: library part 954-103AT-2, "NTC Termistor, 1%", Supplier Part Number 1=4316-103AT-2-ND, Supplier 1=DigiKey
S1: "Taktilni prekidač", Manufacturer=E-Switch, Supplier Part Number 1=612-TL3301AF1, Category="Tactile Switches", ComponentLink1Description=https://datasheet.ciiva.com/2900/p010516d-2900775.pdf?src-supplier=Digi-Key, Manufacturer Part Number=TL3301AF160QG, Supplier 1=Mouser
U1: "Integrirani Buffer", Manufacturer="Texas Instruments", Manufacturer Part Number=BUF602ID, Supplier Part Number 1=595-BUF602ID, Category="Operational Amplifiers", Supplier 1=Mouser
U2: "Logaritamsko pojačalo", Case/Package=MSOP, Manufacturer="Analog Devices", Supplier Part Number 1=584-AD8310ARMZ-R7, Category="Amplifiers - Op Amps, Buffer, Instrumentation", ComponentLink1Description=https://datasheet.ciiva.com/15128/getdatasheetpartid-243611-15128567.pdf?src-supplier=Verical, Manufacturer Part Number=AD8310ARMZ-REEL7, Supplier 1=Mouser
U3: "STM32 Mikrokontroler, 1,7-3,6V", Case/Package=UFQFPN-48, Manufacturer=STMicroelectronics, Supplier Part Number 1=511-STM32WB55CGU6, Category=Microcontroller, ComponentLink1Description=http://www.farnell.com/datasheets/2792352.pdf?src-supplier=Farnell, Manufacturer Part Number=STM32WB55CGU6, Supplier 1=Mouser
U4: "Li-Ion baterija, 800mA", Case/Package=WSON-10, Manufacturer_Name="Texas Instruments", Mouser Part Number=595-BQ24040DSQR, Arrow Part Number=BQ24040DSQR, Arrow Price/Stock=https://www.arrow.com/en/products/bq24040dsqr/texas-instruments?utm_currency=USD&region=nac, Datasheet Link=http://www.ti.com/lit/gpn/bq24040, Height=0.8mm, Manufacturer_Part_Number=BQ24040DSQR, Mouser Price/Stock=https://www.mouser.co.uk/ProductDetail/Texas-Instruments/BQ24040DSQR?qs=c7TMWs5treTJYvOlVMq%252B%2Fw%3D%3D, Supplier 1="Arrow Electronics", Supplier Part Number 1=BQ24040DSQR
U5: "IC Regulator, 3,3V, 400mADC", Case/Package=SOT-23, Manufacturer="Texas Instruments", Supplier Part Number 1=595-TPS73633DBVR, Category="Voltage Regulators - Linear", ComponentLink1Description=https://datasheet.ciiva.com/41462/001015026-da-01-en-ic-reg-ldo-3-3v-0-tps73633dbvr-sot-5-tid-41462871.pdf?src-supplier=Conrad, Manufacturer Part Number=TPS73633DBVR, Supplier 1=Mouser
U6: "Integrirani Schmittov okidni sklop", Kučište=0805, Supplier 1=Farnell, Supplier Part Number 1=74AHC1G17GWH
X1: "SMA priključak", Manufacturer="Wurth Electronics", Supplier Part Number 1=710-60312002114503, Category="SMA Connector", Manufacturer Part Number=60312002114503, Supplier 1=Mouser
X2: library part 68001-204HLF, "Header 1x4", Manufacturer="Amphenol FCI", Supplier Part Number 1=649-68001-204HLF, Category="Headers and Wire Housings", ComponentLink1Description=https://datasheet.ciiva.com/5164/68000-274255-5164127.pdf?src-supplier=Mouser, Manufacturer Part Number=68001-204HLF, Supplier 1=Mouser
X3: library part "Header 2", "Header, 2-Pin", LatestRevisionDate=17-Jul-2002, LatestRevisionNote="Re-released for DXP Platform.", Publisher="Altium Limited"
Y1: library part NX2012SA32768K1, "Kristalni oscilator 32KHz", Manufacturer=NDK, Manufacturer Part Number=NX2016SA-32MHZ-EXS00A-CS10925, Supplier Part Number 1=644-1375-1-ND, Category=Crystal, Kučište=0805, Supplier 1=DigiKey, Supplier 2=Mouser, Supplier Part Number 2=344-NX2016SA32S06465
Y2: library part NX2012SA-32.768K-STD-MUB-1, "Kristalni oscilator, 32.768KHz", Case/Package=SMD/SMT, Manufacturer=NDK, Manufacturer Part Number=NX2012SA-32.768KHZ-EXS00A-MU00626, Supplier Part Number 1=344-NX2012SA32768K1, Category=Crystal, Kučište=0805, Supplier 1=Mouser

## Via types
v1: diameter 23.62, hole 11.81, Top Layer to GND 1, 73 vias
v2: diameter 23.62, hole 11.81, Top Layer to Bottom Layer, 7 vias

## Nets (pads, with @x,y where several pads share a name; then routed paths per layer and width w, separated by ;. In a path a pad name is that pad's centre, name@x,y a point inside that pad or via, vN(x,y) a via of type N, cw(c..) or ccw(c..) an arc to the next point about the centre after c; other vN are vias at no path point)
3V3: 3.2 C4.2 C12.1 C14.2 C15.2 C16.2 C17.2 C19.2 C20.2 C21.2 C26.2 C30.2 FB1.1 R4.2 R20.2 U1.1 U3.1 U3.20 U3.23 U3.35 U3.40 U3.48 U5.5 U6.5 | length 1059.5
  Top Layer w10: C16.2@4422.15,3012.7 4493.39,3012.7 4502.07,3004.02 U3.35@4502.07,2981.2
  Top Layer w12: C26.2 C26.2@4017.32,3015.35 ; U5.5@4017.32,2936.42 U5.5 ; v2(4347.26,2888.05) 4348.3,2889.08 4451.09,2889.08 U3.40 ; C16.2 C16.2@4422.15,3012.7
  Top Layer w15: C17.2@4393.7,2757.87 4393.7,2750.28 4410.81,2733.17 U3.48@4440.37,2733.17 ; C14.2@4410,2673.66 4455.21,2673.66 4472.42,2690.87 U3.1@4481.63,2690.87 ; U1.1@4482.92,2191.35 U1.1@4484.28,2189.99 ; U3.35@4502.07,2981.2 U3.35 ; U3.20 4732.18,2869.19 4796.21,2869.19 4805,2860.41 4805,2757.78 4813.79,2749 4815.85,2749 4830,2734.84 C15.2 ; U3.23 4809.06,2929.13 4850.39,2970.47 C21.2 4850.39,3031.5 C20.2 ; U6.5@4820.59,2450.43 4820.59,2383.5 C30.2
  Top Layer w40: U5.5@4017.32,2936.42 C26.2@4017.32,3015.35 ; FB1.1 C19.2
  other v1: 4850,2795
BOOT0: R8.1 U3.4 | length 540.4
  Top Layer w10: U3.4 4542.32,2655.82 v2@4550,2648.14
  Top Layer w12: v2(4388.74,2280) R8.1
  Bottom Layer w12: v2@4385,2280 4550,2445 v2(4550,2645)
GND: 3.1 C2.1 C4.1 C5.2 C7.1 C8.2 C9.1 C10.1 C11.1 C12.2 C13.1 C14.1 C15.1 C16.1 C17.1 C18.1 C19.1 C20.1 C21.1 C22.1 C24.1 C25.1 C26.1 C27.2 C28.1 C29.1 C30.1 D1.1 D3.1 IPD1.A2 IPD1.B1 IPD1.B2 IPD1.B3 J1.A12 J1.B12 L4.2 R1.1 R5.1 R6.1 R8.2 R10.1 R11.1 R15.1 R21.1 S1.1 S1.2 U1.5 U2.2 U3.22 U3.32 U4.3 U4.11 U5.2 U6.3 X1.2 X1.3 X1.4 X1.5 X2.2 X3.NEG Y1.2 Y1.4 | length 2234.2
  Top Layer w10: v1(4223.43,2312.02) U4.3@4223.43,2353.62 ; U3.32 4562.01,3016.84 4588.9,3043.74 v1@4588.9,3073.15
  Top Layer w15: X3.NEG 3728.02,2948.82 v1(3795.28,2948.82) ; v1(3763.78,2740.16) 3796.87,2740.16 3811.02,2754.31 3811.02,2755.91 ; J1.A12 3802.36,2327.76 3853.35,2327.76 v1(3854.33,2326.77) ; J1.B12 3802.36,2544.29 3853.35,2544.29 v1(3854.33,2543.31) ; v1(3838.58,2968.5) 3838.58,3015.75 ; D3.1 v1(4078.74,3303.15) ; v1(4059.06,2783.46) U5.2 ; v1(4062.99,2685.04) 4063.78,2685.83 4125.2,2685.83 R21.1 ; C25.1 v1(4102.36,3125.98) ; v1(4164.37,2177.17) R15.1 ; R10.1 v1(4200.79,2661.42) ; X2.2 4209.06,3137.4 4279.13,3137.4 v1(4279.53,3137.8) ; U4.11 4225.39,2407.48 4308.92,2407.48 R11.1@4310.88,2405.51 ; C9.1 4266.33,2099.93 v1(4266.33,2054.28) ; v1(4283.46,2763.78) 4308.68,2763.78 4311.02,2761.44 C17.1 ; v1(4295.28,3031.5) 4324.43,3031.5 4338.58,3017.34 C16.1 ; v1(4329.16,2451.61) 4329.16,2405.21 R11.1 ; v1(4365,1860.08) R1.1 ; v1(4389.64,2060.27) 4389.64,2112.98 3.1@4390,2113.33 ; C14.1 4413.94,2588.1 v1(4413.94,2548.73) ; C18.1 v1(4452.76,3204.72) ; C10.1 4521.26,2371.26 C11.1 v1(4590,2325) ; R8.2 v1(4563.74,2280) ; C13.1 v1(4531.5,3204.72) ; v1@4588.9,3073.15 v1(4590.55,3074.8) ; v1(4615,2285) D1.1 ; C22.1 v1(4645.67,3165.35) ; v1(4664.2,2076.81) 4664.2,2104.37 ; C2.1 4817.74,2072.87 v1(4861.05,2072.87) ; IPD1.A2 4849.88,2920.75 v1(4850.39,2921.26) ; C15.1@4900.87,2725 v1(4952.05,2725) ; C20.1 v1(4948.82,3047.24) ; C30.1 v1(4966.26,2371.69) ; U6.3@4928.86,2533.11 v1(4978.07,2533.11) ; C21.1 v1(4980.31,2980.32) ; v1(5003.94,2807.09) L4.2 ; C4.1 v1(5124.92,1895) ; U2.2 5086.54,2374.1 5090.1,2377.67 v1(5090.1,2380) ; v1(5100,2465) 5100.16,2464.84 5100.16,2430.16 C28.1 ; C7.1 5242.68,2413.94 v1(5289.92,2413.94) ; R5.1 v1(5240,2345) ; C29.1 C29.1@5520.8,2414.2
  other v1: 5230,2000 5160,2500 4751.97,3015.75
NetANT1_1: ANT1.1 L3.2 | length 47.2
  Top Layer w7.87: L3.2 ANT1.1@5129.92,2889.76
NetC1_1: C1.1 R1.2 X1.1 | length 106.3
  Top Layer w15: R1.2 4465.63,1990 C1.1
NetC1_2: C1.2 R2.2 U1.4 | length 254.3
  Top Layer w15: U1.4@4484.28,2113.22 4484.28,2061.85 4553.96,1992.16 4553.96,1982.32 R2.2
NetC2_2: C2.2 R2.1 U1.6 | length 231.9
  Top Layer w15: U1.6 4708.75,2142.49 4731.13,2120.11 C2.2@4731.13,2076.81 ; R2.1 4731.13,1986.25 4731.13,2065 C2.2
NetC5_1: C5.1 R4.1 U2.5 U2.7 | length 326.6
  Top Layer w15: R4.1 4935,2098.31 4968.82,2132.13 5034,2132.13 5035.35,2133.48 U2.5 ; U2.7 5086.54,2013.46 C5.1
NetC6_1: C6.1 R3.2 R5.2 | length 522.9
  Top Layer w15: R3.2 4857.91,2194.12 4880.05,2216.26 R5.2 5238.74,2215 C6.1
NetC6_2: C6.2 U2.8 | length 86.8
  Top Layer w15: U2.8 5112.13,2129.05 5113.48,2127.7 5127.3,2127.7 5136,2119 5145.85,2119 5160,2104.84 C6.2
NetC7_2: C7.2 U2.1 | length 92
  Top Layer w15: U2.1 5113.48,2312.5 5119.19,2312.5 5160,2353.31 C7.2@5160,2380
NetC8_1: C8.1 U2.6 | length 135.7
  Top Layer w15: C8.1 5020,2065.08 5060.94,2106.02 U2.6
NetC10_2: C10.2 U3.2 Y2.2 | length 380.7
  Top Layer w10: C10.2 Y2.2 4436.26,2464.84 4471.42,2500 4500.91,2500 4502.95,2502.05 U3.2
NetC11_2: C11.2 U3.3 Y2.1 | length 250.2
  Top Layer w10: 4522.64,2625 4522.64,2462.64 Y2.1 4585,2455 C11.2
NetC13_2: C13.2 C18.2 U3.34 | length 215.8
  Top Layer w12: U3.34 4522.64,3012.8 4478.25,3057.18 4478.25,3067.02 4462.6,3082.68 C18.2 C13.2
NetC22_2: C22.2 L1.2 U3.31 | length 266.2
  Top Layer w10: U3.31 4582.38,2981 4582.38,3001.7 4591.88,3011.2 4603.72,3011.2 C22.2@4635.83,3043.31 ; C22.2@4655.51,3043.31 4698.56,3086.36
  Top Layer w12: C22.2@4635.83,3043.31 C22.2 C22.2@4655.51,3043.31 ; 4698.56,3086.36 4698.56,3100.14 v2(4700.79,3102.36)
  Bottom Layer w12: L1.2 4683.35,3082.68 4700.79,3100.11 v2(4700.79,3102.36)
NetC23_1: C23.1 IPD1.A1
NetC23_2: C23.2 L3.1 L4.1 | length 126
  Top Layer w7.87: 4874.02,2889.76 C23.2@4921.26,2889.76 ; 4964.57,2889.76 L4.1 L3.1
NetC25_2: C25.2 U5.4 | length 64.8
  Top Layer w12: U5.4 4100.39,2998.03 C25.2
NetC27_1: C27.1 J1.A9 J1.B9 U4.1 | length 461.7
  Top Layer w12: J1.B9 3752.76,2496.85 3740.16,2484.25 3740.16,2397.64 3760.63,2377.17 J1.A9 3813.98,2377.17 J1.A9@3828.94,2362.2 ; 3947.05,2362.2 4146.65,2362.2 C27.1
NetC28_2: C28.2 U2.3 | length 118.9
  Top Layer w15: U2.3 C28.2
NetC29_2: C29.2 S1.3 S1.4 U3.14 | length 10.5
  Top Layer w15: C29.2 C29.2@5527.44,2501.18
NetD1_2: D1.2 R16.1 | length 76.3
  Top Layer w10: D1.2@4745,2290 R16.1
NetD2_1: D2.1 U4.8 | length 143.1
  Top Layer w10: U4.8@4222.02,2452 4222.02,2519.26 4251.97,2549.21 D2.1
NetD2_2: D2.2 R13.2 | length 70.9
  Top Layer w12: D2.2 R13.2
NetD3_2: D3.2 R20.1 | length 63
  Top Layer w12: R20.1 D3.2
NetFB1_2: FB1.2 U3.8 | length 116.1
  Top Layer w10: FB1.2 4594.14,2600 4610.8,2616.65 4610.8,2630.8 4620.49,2640.49 4620.49,2683.85 4620.75,2684.11 4620.75,2700.47 U3.8
NetIPD1_A3: IPD1.A3 U3.21 | length 78.7
  Top Layer w7.87: U3.21@4748.03,2889.76 IPD1.A3
NetJ1_A5: J1.A5 R12.1
NetJ1_B5: J1.B5 R14.2
NetL1_1: L1.1 L2.2 | length 82
  Bottom Layer w12: L2.2 4547.24,3157.48 L1.1@4618.11,3157.48
NetL2_1: L2.1 U3.33 | length 107.5
  Top Layer w10: v2(4541.13,3033.41) 4542.01,3032.53 4542.01,2980.63 U3.33
  Bottom Layer w12: L2.1 4541.13,3084.85 v2(4541.13,3033.41)
NetR3_1: R3.1 U1.8 | length 161.2
  Top Layer w15: U1.8 4763.3,2193.68 4765.63,2191.35 4772.09,2191.35 4786.24,2177.2 R3.1@4786.24,2167.36
NetR6_2: R6.2 U4.7 | length 65
  Top Layer w10: U4.7@4239,2450.59 4239,2483.09 4248.03,2492.13 4267.72,2492.13
NetR7_1: R7.1 X2.4 | length 100.1
  Top Layer w12: X2.4 4303.15,2937.01 R7.1
NetR9_1: R9.1 X2.3 | length 365.4
  Top Layer w12: X2.3 4199.43,3027.78 4199.43,3002.58 4157.48,2960.63 4157.48,2905.51 4177.17,2885.83 4303.99,2885.83 4311.02,2878.8 R9.1
NetR10_2: R10.2 R21.4 U4.9 | length 230.2
  Top Layer w10: R21.4@4135.43,2586.61 4200.79,2521.26 ; R10.2 4200.79,2521.26 ; 4205.03,2489.17 4200.79,2493.42 4200.79,2521.26 ; U4.9 4207.68,2489.17
NetR11_2: R11.2 U4.4 | length 102.3
  Top Layer w10: U4.4@4240.41,2367.07 4240.41,2341.28 4254.92,2326.77 R11.2@4310.88,2326.77
NetR12_2: R12.2 R14.1 | length 55.6
  Top Layer w12: R14.1 4055.71,2410.04 4055.71,2463.98 R12.2
NetR15_2: R15.2 U4.2 | length 87.1
  Top Layer w10: R15.2@4174.21,2303.15 4206.44,2335.38 U4.2@4206.44,2367.07
  Top Layer w12: R15.2 R15.2@4174.21,2303.15
NetR16_2: R16.2 U3.11 | length 690.9
  Top Layer w10: U3.11 4680.43,2700.47 4680.43,2668.25 4745,2603.68 R16.2
  Bottom Layer w10: 4660,2255 4660,2303.69 4680,2323.69 4680,2655
NetR17_1: R17.1 R18.1 U2.4 | length 427.4
  Top Layer w10: R17.1 R18.1
  Top Layer w15: R18.1 4980,2650 5034.91,2595.09 5034.91,2311.58 U2.4
NetR17_2: R17.2 R19.2 U3.13 | length 182
  Top Layer w10: U3.13 4744.88,2732.28 4745.2,2731.97 4745.2,2724.8 R19.2 R17.2
NetR18_2: R18.2 U6.2 | length 201.6
  Top Layer w12: U6.2@4928.86,2491.77 4983.13,2491.77 5010.88,2519.52 5010.88,2569.75 R18.2@4970,2610.63
NetR19_1: R19.1 U6.4 | length 74.7
  Top Layer w15: R19.1 4820.43,2610.2 4820.43,2536.77 U6.4
NetU3_24: U3.24 Y1.1 | length 137.6
  Top Layer w10: U3.24@4731.44,2948.54 ccw(c4671.26,3069.88) Y1.1
NetU3_25: U3.25 Y1.3 | length 171.5
  Top Layer w10: 4699.06,3024.9 cw(c4799.21,3015.75) Y1.3 Y1.3@4771.13,3121.97 ; U3.25 4699.8,3024.83
NRST: C9.2 U3.7 | length 844.2
  Top Layer w10: v2(4230,2270) 4265,2235 C9.2 ; v2(4590,2655) 4590,2658.69 4601.06,2669.75 4601.06,2699.59 U3.7@4601.38,2699.9
  Bottom Layer w10: v2(4230,2270) 4230,2266.31 4246.75,2249.57 4246.75,2233.25 4255,2225 4367.69,2225 4590,2447.31 v2(4590,2655)
SWCLK: R9.2 U3.41 | length 84.1
  Top Layer w12: R9.2 4389.76,2840.55 4405.42,2856.2 4415.26,2856.2 4428.45,2869.39 4451.09,2869.39 U3.41
SWDIO: R7.2 U3.39 | length 80.4
  Top Layer w12: R7.2 4385.83,2925.1 4401.48,2909.45 U3.39
VBAT+: C24.2 R13.1 U4.10 U5.1 U5.3 X3.POS | length 498.6
  Top Layer w12: C24.2 U5.1@4007.87,2827.76
  Top Layer w40: X3.POS X3.POS@3741.14,2827.76 ; 3859.25,2827.76 U5.1@4007.87,2827.76 ; 4118.11,2827.76 4160.43,2827.76 4251.97,2736.22 R13.1
pads on no net: ANT1.2 J1.MP1 J1.MP2 J1.MP3 J1.MP4 U1.2 U1.3 U1.7 U3.5 U3.6 U3.9 U3.10 U3.12 U3.15 U3.16 U3.17 U3.18 U3.19 U3.26 U3.27 U3.28 U3.29 U3.30 U3.36 U3.37 U3.38 U3.42 U3.43 U3.44 U3.45 U3.46 U3.47 U3.49 U4.5 U4.6 U6.1 X2.1
copper on no net: | length 164.3
  Top Layer w10: 4522.64,2625 4522.64,2645.67 4522.64,2700.79 ; 4751.97,3015.75 4764.76,3028.54 4764.76,3057.09 ; 4806.1,3114.17 v1@4847.44,3114.17 ; 4818.58,3110.24 4818.93,3110.58
  other v1: 5025,2665 5105,2665 5180,2665 5270,2665 5025,2755 4516.2,2775.96 4567.14,2776.96 4618.11,2776.96 4670.09,2777.96 4672.54,2812.55 4518.03,2814.57 4565.55,2814.57 4618.11,2814.96 4669.54,2854.55 4617.13,2858.27 4519.68,2859.25 4565.54,2858.55 4518.54,2898.55 4564.54,2899.55 4617.54,2899.55 4669.54,2902.55 5025,2960 5025,3035 4847.79,3114.52 5025,3120 5100,3120 5175,3120 5265,3120

## Polygon pours and split planes (outlines as drawn)
no net on GND 1 "NONET_L02_P000" (solid, pour order 0): 2874.02,3661.42 5433.07,3661.42 5433.07,1535.43 2874.02,1535.43

## Other copper
Top Layer:
  pour cut-out: 5054.13,2697.83 5310.04,2697.83 5310.04,3083.66 5054.13,3083.66

## Silkscreen, mask and mechanical layers (free items; w line width, h text height)
Mechanical 1:
  lines w10: 3110.24,1633.86 cw(c3110.24,1792.56) 2951.53,1792.56 2951.53,3443.66 cw(c3110.24,3443.66) 3110.24,3602.36 3111.46,3603.59 ; 3110.85,3602.97 5156.87,3602.97 5157.48,3603.59 cw(c5157.48,3444.88) 5316.19,3444.88 ; 3111.46,1632.63 5156.25,1632.63 ccw(c5156.25,1791.34) 5314.96,1791.34 5314.96,3444.88

## Dimensions
5314.96,1633.86 to 5374.02,3602.36 on Mechanical 1
2943.16,1577.42 to 5305.37,1636.48 on Mechanical 1